# EAGLE board ldr (EAGLE 5.00)
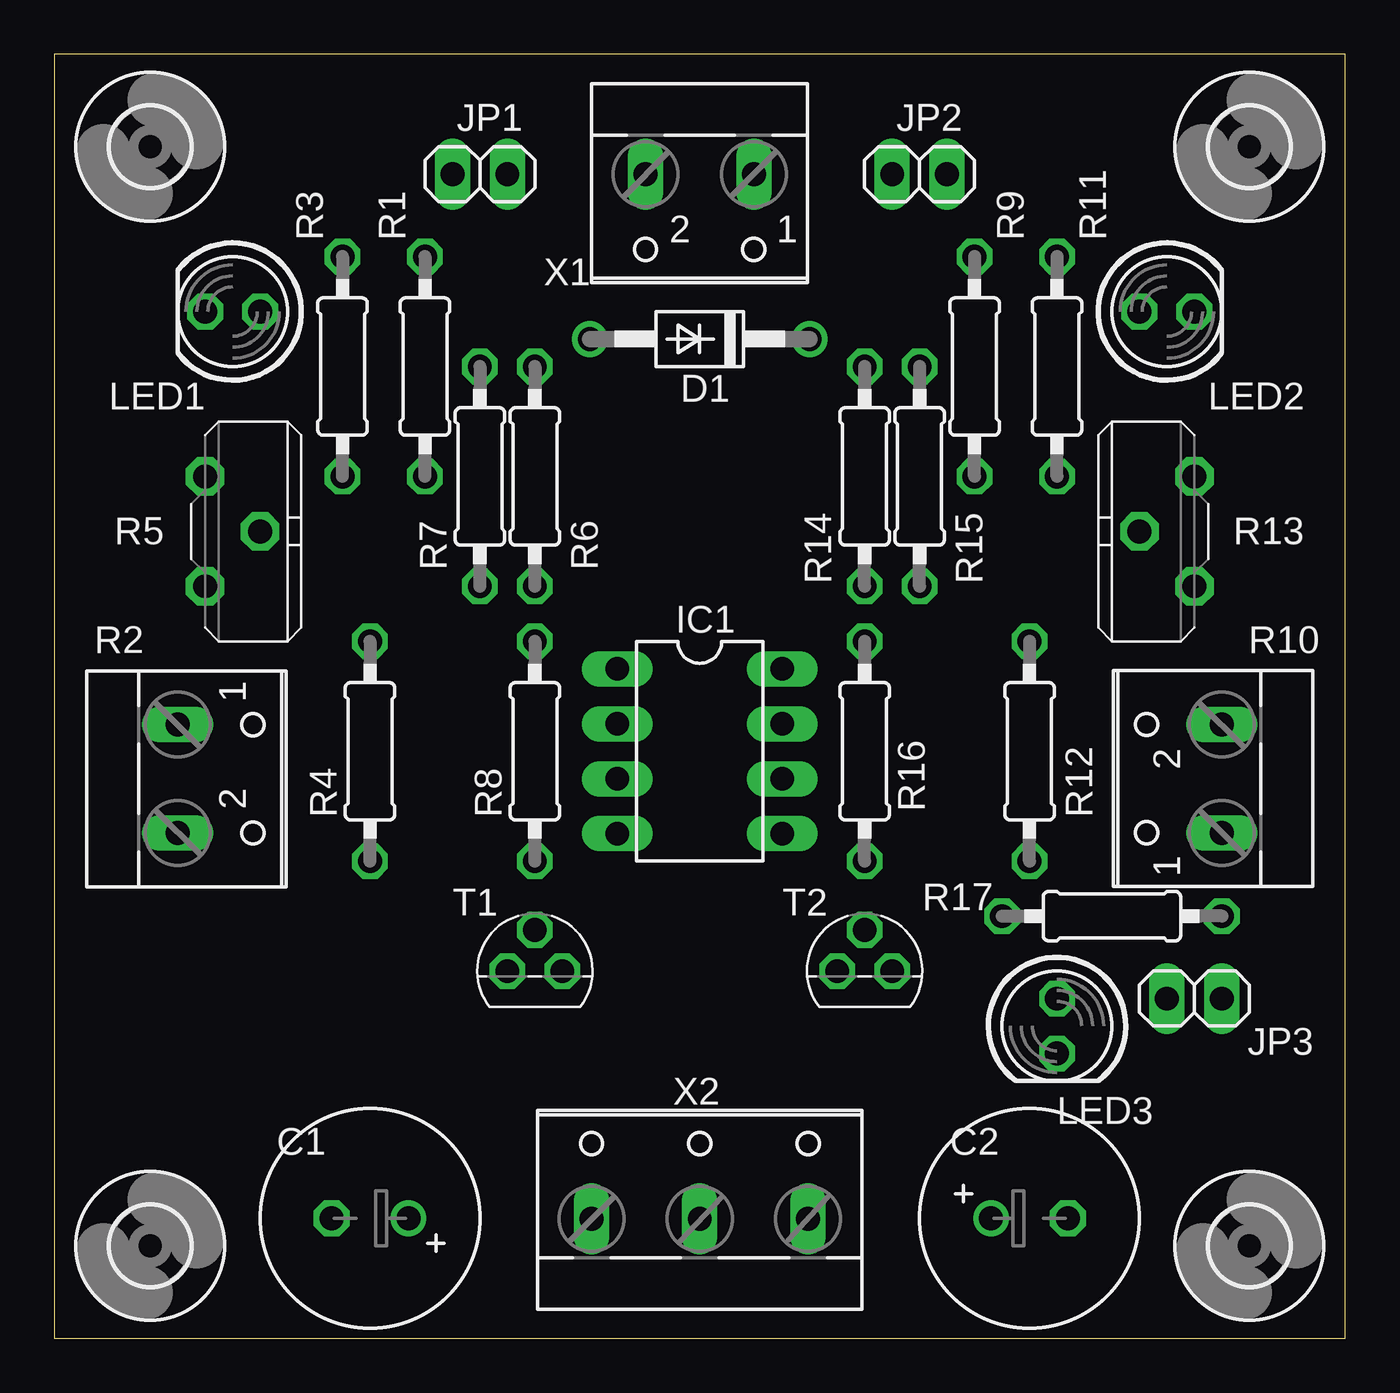
[diagram p0: board, top side]
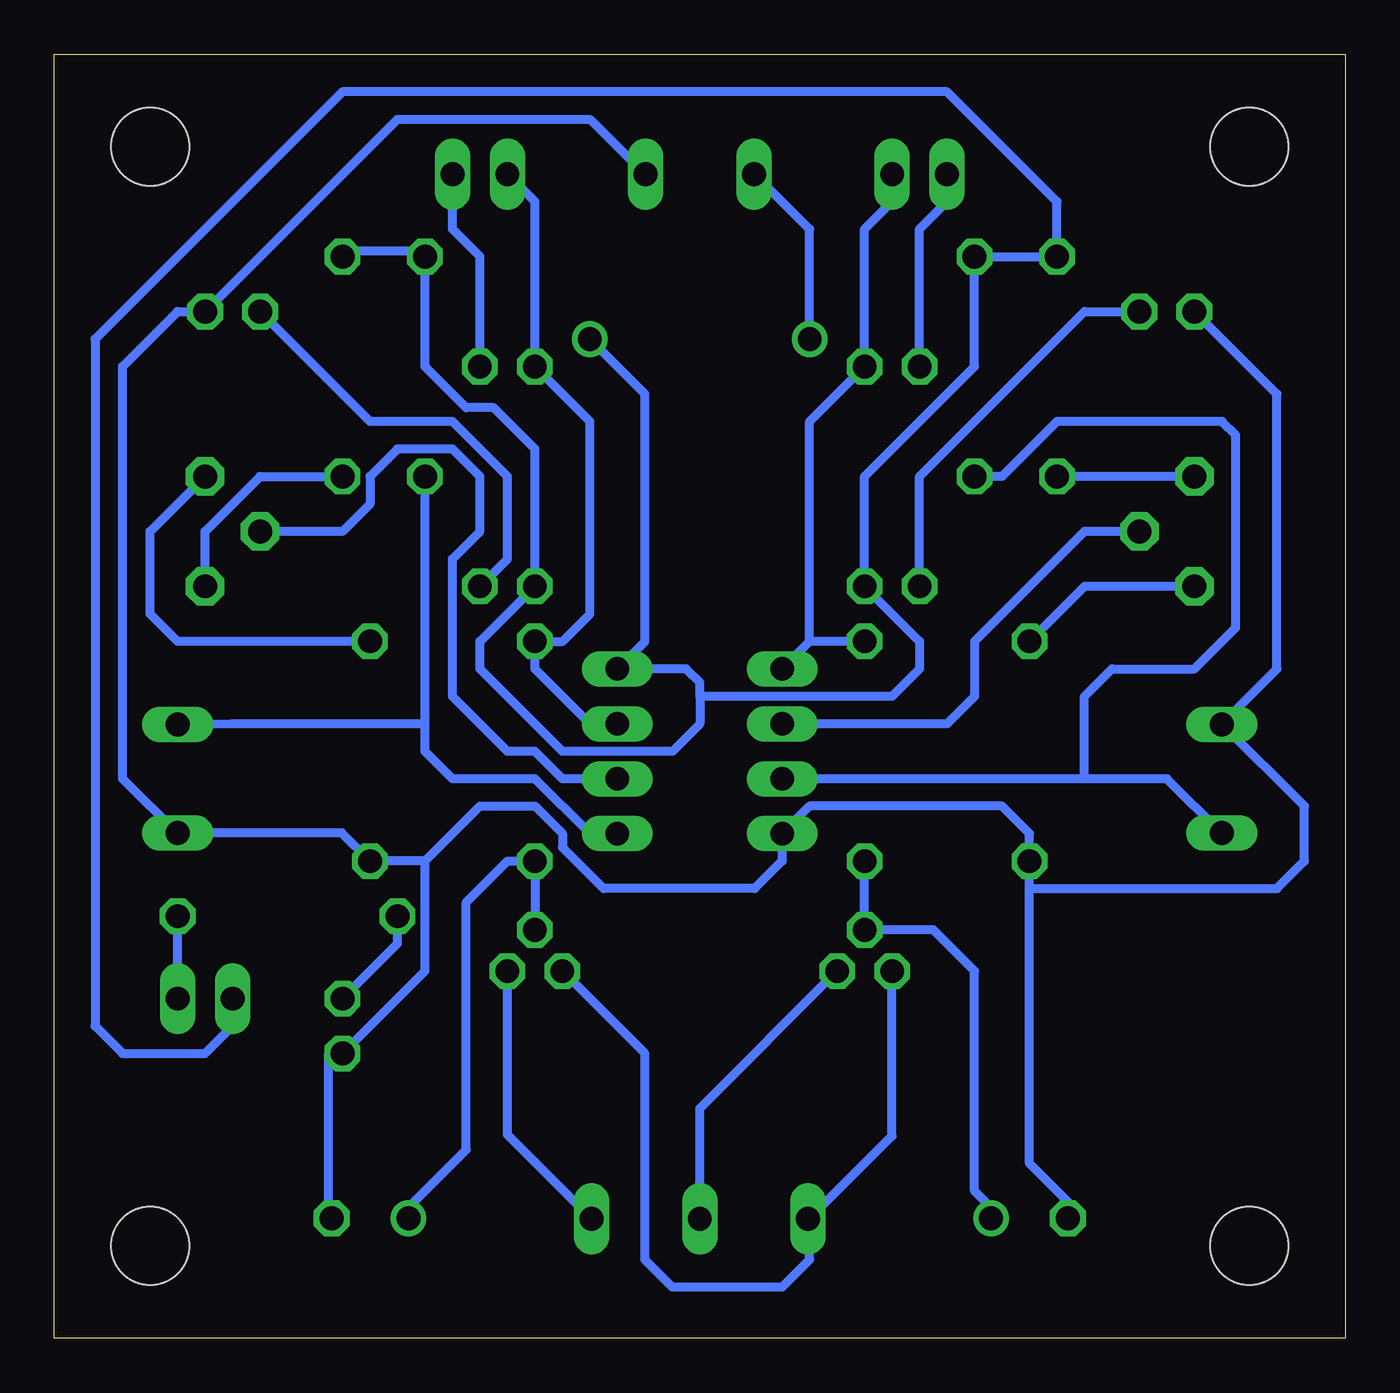
[diagram p1: board, bottom side, seen from below]

Size 59.68 x 59.36 mm. Coordinates in mm from the lower left corner, seen from the top.
Outline: 0,59.36 0,0 59.68,0 59.68,59.36 0,59.36
Copper layers (1*16): Top 0.035mm / dielectric 1.5mm / Bottom 0.035mm
Design rules "default": minimum track width 10mil, minimum drill 24mil, track to track 8mil, track to pad 8mil, pad to pad 8mil, via to via 8mil, smd to smd 8mil, copper to edge 40mil, drill to drill 8mil, minimum pad ring 10mil, minimum via ring 8mil, stop-mask expansion 4mil, vias tented up to drill 0mil, thermal gap 10mil

## Footprints (pad centres in the part's own frame; a part is rotated, then mirrored left to right if it is on the bottom)
E3,5-10 = drill 1.1 round: + -1.778,0 | drill 1.1 octagon: - 1.778,0
DO41-10 = drill 1.1 round: A 5.08,0; C -5.08,0
DIL08 = drill 1.1 long: 1 -3.81,-3.81; 2 -1.27,-3.81; 3 1.27,-3.81; 4 3.81,-3.81; 5 3.81,3.81; 6 1.27,3.81; 7 -1.27,3.81; 8 -3.81,3.81
1X02 = drill 1.1 long: 1 -1.27,0; 2 1.27,0
LED5MM = drill 1.1 octagon: A -1.27,0; K 1.27,0
0207/10 = drill 1.1 octagon: 1 -5.08,0; 2 5.08,0
W237-102 = drill 1.1 long: 1 -2.5,-1.27; 2 2.5,-1.27
PT-10S = drill 1.1 pad 1.778 octagon: 1 -2.54,-1.27; 2 2.54,-1.27; 3 0,1.27
TO92 = drill 1.1 octagon: 1 1.27,0; 2 0,1.905; 3 -1.27,0
3,6 = hole 3.6: 0,0
W237-103 = drill 1.1 long: 1 -5,-1.29; 2 0,-1.29; 3 5,-1.29

## Placement (x,y rotation side)
C1  220uF  [E3,5-10]  14.6,5.55 180 top
C2  220uF  [E3,5-10]  45.08,5.55 0 top
D1  1N4001  [DO41-10]  29.84,46.19 180 top
IC1  LM393N  [DIL08]  29.84,27.14 270 top
JP1  [1X02]  19.68,53.81 180 top
JP2  [1X02]  40,53.81 0 top
JP3  [1X02]  52.7,15.71 0 top
LED1  [LED5MM]  8.25,47.46 180 top
LED2  [LED5MM]  51.43,47.46 0 top
LED3  [LED5MM]  46.35,14.44 270 top
R1  10K  [0207/10]  17.14,44.92 90 top
R2  [W237-102]  6.98,25.87 270 top
R3  470  [0207/10]  13.33,44.92 90 top
R4  470  [0207/10]  14.6,27.14 90 top
R5  10K  [PT-10S]  8.25,37.3 270 top
R6  1K  [0207/10]  22.22,39.84 270 top
R7  1K  [0207/10]  19.68,39.84 90 top
R8  10K  [0207/10]  22.22,27.14 270 top
R9  10K  [0207/10]  42.54,44.92 90 top
R10  [W237-102]  52.7,25.87 90 top
R11  470  [0207/10]  46.35,44.92 90 top
R12  470  [0207/10]  45.08,27.14 90 top
R13  10K  [PT-10S]  51.43,37.3 90 top
R14  1K  [0207/10]  37.46,39.84 270 top
R15  1K  [0207/10]  40,39.84 90 top
R16  10K  [0207/10]  37.46,27.14 270 top
R17  1K  [0207/10]  48.89,19.52 0 top
T1  BC547  [TO92]  22.22,16.98 0 top
T2  BC547  [TO92]  37.46,16.98 0 top
U$1  [3,6]  4.44,4.28 0 top
U$2  [3,6]  4.44,55.08 0 top
U$3  [3,6]  55.24,55.08 0 top
U$4  [3,6]  55.24,4.28 0 top
X1  [W237-102]  29.84,52.54 180 top
X2  [W237-103]  29.84,6.82 0 top

## Library data of the parts
C1 C2 D1 IC1 JP1-JP3 LED1-LED3 R1-R17 T1 T2 U$1-U$4 X1 X2 = ldr-board

## Nets
+12V: D1.C IC1.8 JP3.1 R1.2 R3.2 R6.2 R9.2 R11.2 R14.2
COMUM: T1.3 T2.3 X2.1
GND: C1.- C2.- IC1.4 LED1.K LED2.K LED3.K R2.1 R4.1 R10.1 R12.1 X1.1
N$1: IC1.3 R1.1 R2.2
N$2: R3.1 R5.1
N$3: R4.2 R5.2
N$4: IC1.2 R5.3
N$5: R11.1 R13.1
N$6: IC1.1 JP1.1 R6.1 R8.1
N$7: LED1.A R7.1
N$8: R12.2 R13.2
N$9: C1.+ R8.2 T1.2
N$10: IC1.6 R13.3
N$11: IC1.5 R9.1 R10.2
N$12: IC1.7 JP2.1 R14.1 R16.1
N$13: LED2.A R15.1
N$14: C2.+ R16.2 T2.2
N$15: D1.A X1.2
N$16: JP3.2 R17.2
N$18: LED3.A R17.1
N$20: JP1.2 R7.2
N$21: JP2.2 R15.2
OUT1: T1.1 X2.2
OUT2: T2.1 X2.3

## Tracks (layer width: path | path; a pad name or v marks a point on that pad's centre or on a via)
+12V
  Bottom 0.254: R9.2 43.3,50.25
  Bottom 0.406: 29.84,29.68 20.95,29.68 19.68,30.95 19.68,32.22 R6.2 22.22,39.84 17.14,44.92 R1.2 | 29.84,29.68 29.84,28.41 31.11,27.14 36.19,27.14 40,30.95 40,32.22 R14.2 37.46,41.11 39.36,43.02 40.63,43.02 42.54,44.92 R9.2 | 43.3,50.25 46.1,50.25 R11.2 | D1.C 32.38,43.65 32.38,32.22 IC1.8 30.48,30.95 29.84,30.32 29.84,29.68 | JP3.1 51.43,14.44 52.7,13.17 56.51,13.17 57.78,14.44 57.78,46.19 46.35,57.62 18.41,57.62 13.33,52.54 R3.2 | R1.2 R3.2 | R1.2 R3.2
COMUM
  Bottom 0.406: T2.3 32.38,13.17 32.38,3.65 31.11,2.38 26.03,2.38 24.76,3.65 24.76,5.55 | T1.3 20.95,9.36 24.76,5.55 | 24.76,5.55 24.82,5.55 X2.1
GND
  Bottom 0.406: X1.1 32.38,53.81 34.92,56.35 43.81,56.35 LED2.K 53.97,47.46 56.51,44.92 56.51,25.87 53.97,23.33 R10.1 46.39,23.37 R12.1 42.54,22.06 | LED1.K 3.17,43.65 3.17,30.95 5.71,28.41 | 42.54,22.06 40,24.6 37.46,24.6 36.19,23.33 36.19,22.7 34.28,20.79 27.3,20.79 26.03,22.06 IC1.4 24.76,24.6 15.87,24.6 14.6,23.33 R4.1 14.6,20.79 | 42.54,22.06 42.54,16.98 LED3.K 46.98,13.17 46.98,5.68 C2.- | 5.71,28.41 R2.1 | 5.71,28.41 1.9,24.6 1.9,22.06 3.17,20.79 14.6,20.79 | 14.6,20.79 14.6,8.09 12.69,6.18 12.69,5.55 C1.-
N$1
  Bottom 0.406: 12.06,25.87 IC1.3 | R1.1 15.87,39.84 13.33,42.38 5.71,42.38 5.08,41.74 5.08,32.86 6.98,30.95 10.79,30.95 12.06,29.68 12.06,25.87 | R2.2 5.71,23.33 8.25,25.87 12.06,25.87
N$2
  Bottom 0.406: R5.1 R3.1
N$3
  Bottom 0.406: R5.2 12.06,34.76 R4.2
N$4
  Bottom 0.406: R5.3 12.06,37.3 17.14,32.22 17.14,29.68 18.41,28.41 IC1.2
N$5
  Bottom 0.406: R13.1 52.7,37.3 50.16,39.84 R11.1
N$6
  Bottom 0.406: 24.76,32.22 IC1.1 | 24.76,32.22 24.76,42.38 R6.1 22.22,51.27 20.95,52.54 JP1.1 | R8.1 24.76,32.22
N$7
  Bottom 0.406: R7.1 19.68,39.84 12.06,47.46 LED1.A
N$8
  Bottom 0.406: R12.2 53.97,32.22 55.24,33.49 55.24,37.3 R13.2
N$9
  Bottom 0.406: R8.2 T1.2 19.05,18.89 17.14,16.98 17.14,6.82 16.51,6.18 16.51,5.55 C1.+
N$10
  Bottom 0.406: R13.3 46.35,37.3 45.08,38.57 45.08,39.84 43.81,41.11 41.27,41.11 40,39.84 40,37.3 41.27,36.03 41.27,29.68 38.73,27.14 37.46,27.14 36.19,25.87 IC1.6
N$11
  Bottom 0.406: R10.2 51.43,28.41 42.54,28.41 | IC1.5 34.92,23.33 37.46,25.87 41.27,25.87 42.54,27.14 42.54,28.41 | 42.54,28.41 R9.1
N$12
  Bottom 0.406: JP2.1 37.46,52.54 R14.1 34.92,42.38 34.92,33.49 36.19,32.22 R16.1 37.46,30.95 34.92,28.41 IC1.7
N$13
  Bottom 0.406: R15.1 38.73,36.03 38.73,39.84 41.27,42.38 45.08,42.38 LED2.A
N$14
  Bottom 0.406: T2.2 R16.2 38.73,22.06 40.63,20.16 40.63,8.73 43.17,6.18 43.17,5.68 C2.+
N$15
  Bottom 0.406: X1.2 27.3,53.81 24.76,51.27 D1.A
N$16
  Bottom 0.254: R17.2 53.97,19.77
  Bottom 0.406: JP3.2 R17.2
N$18
  Bottom 0.406: LED3.A 43.81,18.25 R17.1
N$20
  Bottom 0.406: R7.2 19.68,51.27 18.41,52.54 JP1.2
N$21
  Bottom 0.406: R15.2 40,50 41.27,51.27 JP2.2
OUT1
  Bottom 0.406: X2.2 29.84,10.63 T1.1
OUT2
  Bottom 0.406: X2.3 38.73,9.42 T2.1